# EAGLE board Panel2 (EAGLE 6.2)
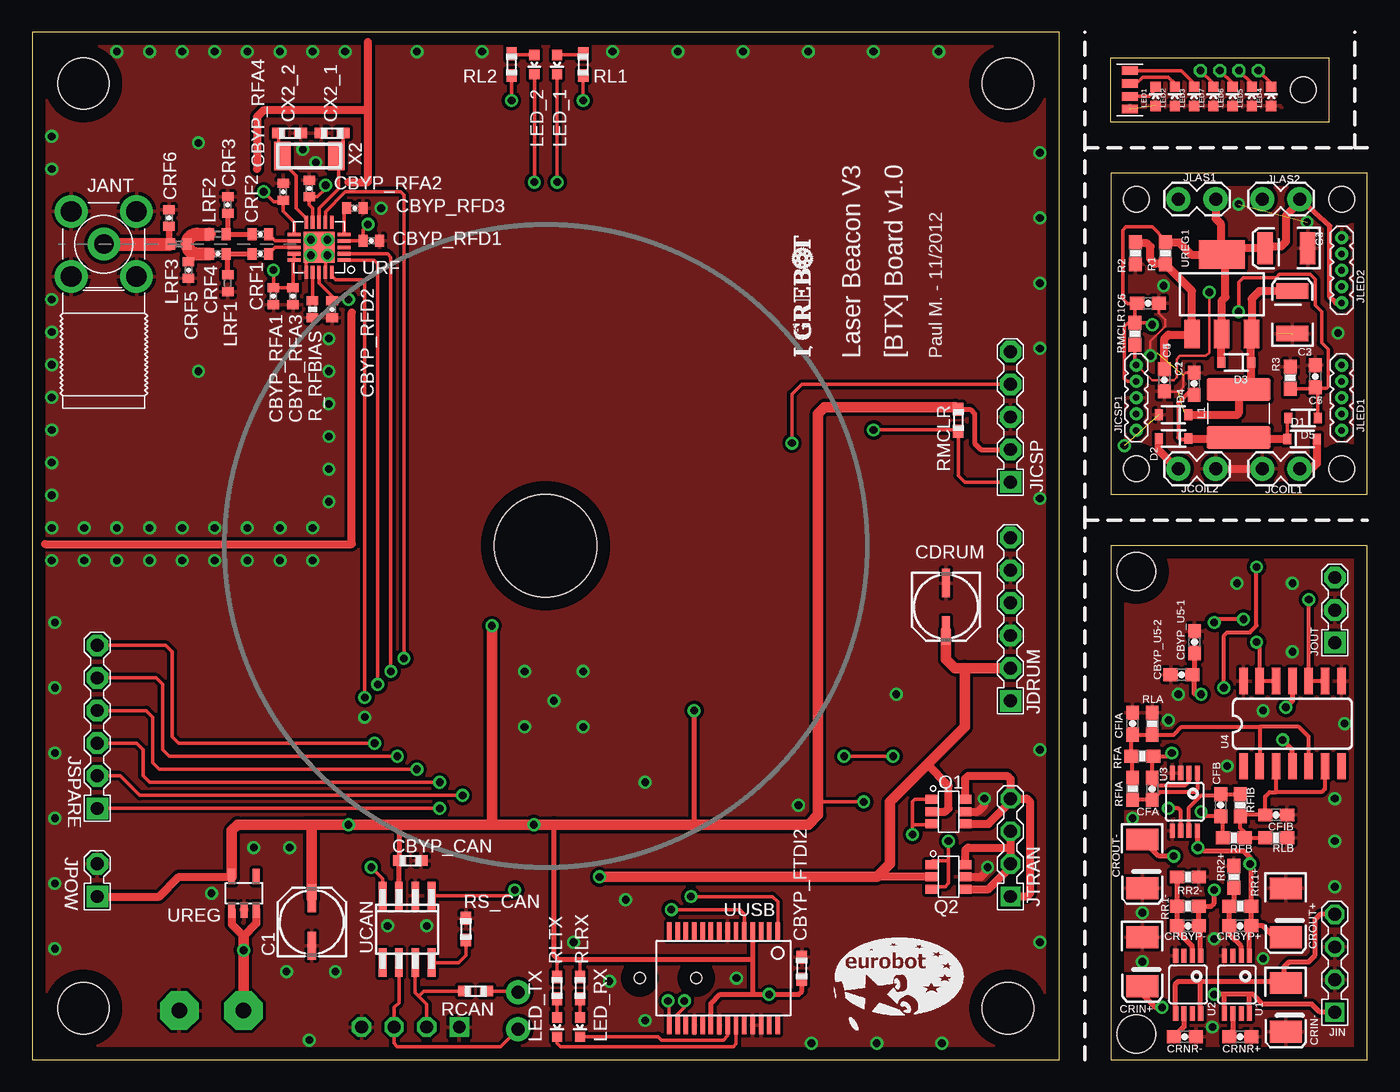
[diagram p0: board, top side]
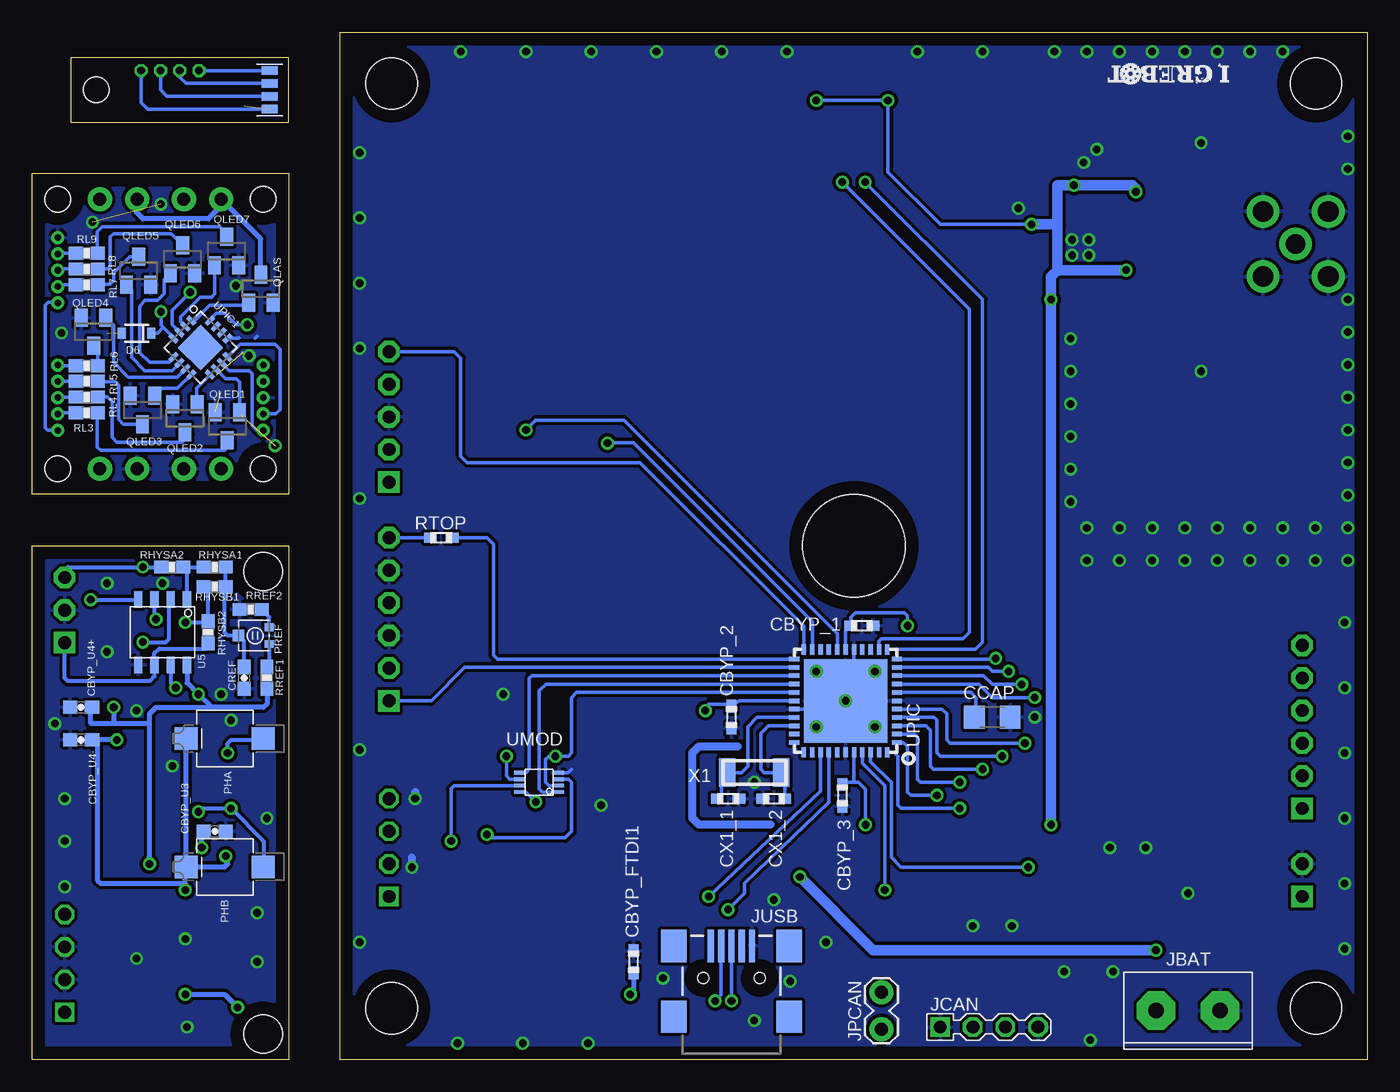
[diagram p1: board, bottom side, seen from below]

Size 104 x 80 mm. Coordinates in mm from the lower left corner, seen from the top.
Outline: 104,44 104,69 84,69 84,44 104,44
Outline: 101,73 84,73 84,78 101,78 101,73
Outline: 104,0 104,40 84,40 84,0 104,0
Outline: 0,0 80,0 80,80 0,80 0,0
Copper layers (1*16): Top 0.035mm / dielectric 1.5mm / Bottom 0.035mm
Design rules: minimum track width 10mil, minimum drill 24mil, track to track 8mil, track to pad 8mil, pad to pad 8mil, via to via 8mil, smd to smd 8mil, copper to edge 40mil, drill to drill 8mil, minimum pad ring 10mil, minimum via ring 8mil, stop-mask expansion 4mil, vias tented up to drill 0mil, thermal gap 10mil
Holes 2 mm at 86,46 102,46 86,67 102,67 99,75.5
Holes 3 mm at 86,38 86,2
Holes 4 mm at 4,4 4,76 76,76 76,4
Holes 8 mm at 40,40

## Footprints (pad centres in the part's own frame; a part is rotated, then mirrored left to right if it is on the bottom)
PANASONIC_C = smd 2.2 x 0.65: + 1.9,-0.2; - -1.8,-0.2
0603-CAP = smd 1.1 x 1: 1 -0.85,0; 2 0.85,0
EIA3528 = smd 1.2 x 2.5: A 1.65,0; C -1.65,0
R0603 = smd 1 x 0.8: 1 -0.85,0; 2 0.85,0
0402-CAP = smd 0.7 x 0.9: 1 -0.65,0; 2 0.65,0
1206 = smd 1.6 x 1.8: 1 -1.4,0; 2 1.4,0
EIA3528-KIT = smd 1.7 x 2.5: A 1.9,0; C -1.9,0
SOD-323 = smd 0.63 x 0.83: 1 -1.15,0; 2 1.15,0
SMA-PCB-ANGLE = drill 1.5 pad 2.54: A 0,0 | drill 1.6 pad 2.54: B1 -2.54,2.54; B2 2.54,2.54; B3 2.54,-2.54; B4 -2.54,-2.54
CON2-5.00 = drill 1.2 pad 3 octagon: 1 -2.5,0; 2 2.5,0
CON4-2.54 = drill 1 square: 1 -3.81,0 | drill 1 octagon: 2 -1.27,0; 3 1.27,0; 4 3.81,0
1X02_LOCK = drill 1.016 pad 1.88: 1 -0.178,0; 2 2.718,0
CON6-2.54 = drill 1 pad 1.676 square: 1 -6.35,0 | drill 1 pad 1.676 octagon: 2 -3.81,0; 3 -1.27,0; 4 1.27,0; 5 3.81,0; 6 6.35,0
CON5-2.54 = drill 1 pad 1.676 square: 1 -5.08,0 | drill 1 pad 1.676 octagon: 2 -2.54,0; 3 0,0; 4 2.54,0; 5 5.08,0
1X05-1.27MM = drill 0.508 pad 1: 1 0,0; 2 1.27,0; 3 2.54,0; 4 3.81,0; 5 5.08,0
CON8-SMD-1 = smd 0.66 x 1.27: 1 -1.5,0; 2 -0.5,0; 3 0.5,0; 4 1.5,0 | smd 0.66 x 1.27 bottom: 5 -1.5,0; 6 -0.5,0; 7 0.5,0; 8 1.5,0
CON3-2.54 = drill 1 pad 1.676 square: 1 -2.54,0 | drill 1 pad 1.676 octagon: 2 0,0; 3 2.54,0
CON2-2.54 = drill 1 pad 1.676 square: 1 -1.27,0 | drill 1 pad 1.676 octagon: 2 1.27,0
USB-MINIB = smd 2.5 x 0.5: D+ 2.5,0; D- 2.5,0.8; GND 2.5,-1.6; ID 2.5,-0.8; VBUS 2.5,1.6 | smd 2.5 x 2: MTN1 -3,4.5; MTN2 2.5,4.5; MTN3 -3,-4.5; MTN4 2.5,-4.5 | hole 0.9: 0,2.2; 0,-2.2
L-5X5 = smd 1.8 x 5: 1 -1.85,0; 2 1.85,0
LED-0603 = smd 0.8 x 0.8: A 0,-0.75; C 0,0.75
C0402 = smd 0.7 x 0.9: 1 -0.65,0; 2 0.65,0
VBPW34SR = smd 1.8 x 1.75: A -3,0; K 3,0
TRIM-PVZ2A = smd 0.6 x 0.7: 1 -0.65,-1.2; 3 0.65,-1.2 | smd 0.9 x 0.9: 2 0,1.2
SSOT6 = smd 0.7 x 1: 1 -0.95,-1.3; 2 0,-1.3; 3 0.95,-1.3; 4 0.95,1.3; 5 0,1.3; 6 -0.95,1.3
SOT23 = smd 1 x 1.4: 1 -0.95,-1.1; 2 0.95,-1.1; 3 0,1.1
0603-RES = smd 1.1 x 1: 1 -0.85,0; 2 0.85,0
0402-RES = smd 0.7 x 0.9: 1 -0.65,0; 2 0.65,0
MSOP8 = smd 0.4 x 1.1: 1 -0.975,-2.25; 2 -0.325,-2.25; 3 0.325,-2.25; 4 0.975,-2.25; 5 0.975,2.25; 6 0.325,2.25; 7 -0.325,2.25; 8 -0.975,2.25
SOIC14 = smd 0.66 x 2.032: 1 -3.81,-3.315; 2 -2.54,-3.315; 3 -1.27,-3.315; 4 0,-3.315; 5 1.27,-3.315; 6 2.54,-3.315; 7 3.81,-3.315; 8 3.81,3.315; 9 2.54,3.315; 10 1.27,3.315; 11 0,3.315; 12 -1.27,3.315; 13 -2.54,3.315; 14 -3.81,3.315
SOIC8 = smd 0.635 x 1.27: 1 -1.905,-2.54; 2 -0.635,-2.54; 3 0.635,-2.54; 4 1.905,-2.54; 5 1.905,2.54; 6 0.635,2.54; 7 -0.635,2.54; 8 -1.905,2.54
SO-08 = smd 0.6 x 2.2: 1 -1.905,-2.6; 2 -0.635,-2.6; 3 0.635,-2.6; 4 1.905,-2.6; 5 1.905,2.6; 6 0.635,2.6; 7 -0.635,2.6; 8 -1.905,2.6
DCU8 = smd 0.3 x 0.8: 1 -0.75,-1.55; 2 -0.25,-1.55; 3 0.25,-1.55; 4 0.75,-1.55; 5 0.75,1.55; 6 0.25,1.55; 7 -0.25,1.55; 8 -0.75,1.55
QFN44-8X8 = smd 0.8 x 0.35: P$1 -4,3.25; P$2 -4,2.6; P$3 -4,1.95; P$4 -4,1.3; P$5 -4,0.65; P$6 -4,0; P$7 -4,-0.65; P$8 -4,-1.3; P$9 -4,-1.95; P$10 -4,-2.6; P$11 -4,-3.25; P$23 4,-3.25; P$24 4,-2.6; P$25 4,-1.95; P$26 4,-1.3; P$27 4,-0.65; P$28 4,0; P$29 4,0.65; P$30 4,1.3; P$31 4,1.95; P$32 4,2.6; P$33 4,3.25 | smd 0.35 x 0.8: P$12 -3.25,-4; P$13 -2.6,-4; P$14 -1.95,-4; P$15 -1.3,-4; P$16 -0.65,-4; P$17 0,-4; P$18 0.65,-4; P$19 1.3,-4; P$20 1.95,-4; P$21 2.6,-4; P$22 3.25,-4; P$34 3.25,4; P$35 2.6,4; P$36 1.95,4; P$37 1.3,4; P$38 0.65,4; P$39 0,4; P$40 -0.65,4; P$41 -1.3,4; P$42 -1.95,4; P$43 -2.6,4; P$44 -3.25,4 | smd 6.5 x 6.5: PAD 0,0
QFN16-0.65 = smd 0.8 x 0.35: 1 -2,0.975; 2 -2,0.325; 3 -2,-0.325; 4 -2,-0.975; 9 2,-0.975; 10 2,-0.325; 11 2,0.325; 12 2,0.975 | smd 0.35 x 0.8: 5 -0.975,-2; 6 -0.325,-2; 7 0.325,-2; 8 0.975,-2; 13 0.975,2; 14 0.325,2; 15 -0.325,2; 16 -0.975,2 | smd 2.5 x 2.5: PAD 0,0
SOT23-5L = smd 0.55 x 1.2: 1 -0.95,-1.3; 2 0,-1.3; 3 0.95,-1.3; 4 0.95,1.3; 5 -0.95,1.3
SOT223 = smd 1.219 x 2.235: 1 -2.311,-3.099; 2 0,-3.099; 3 2.311,-3.099 | smd 3.6 x 2.2: 4 0,3.099
QFN20-0.5 = smd 0.28 x 1: 1 -1,-1.95; 2 -0.5,-1.95; 3 0,-1.95; 4 0.5,-1.95; 5 1,-1.95; 11 1,1.95; 12 0.5,1.95; 13 0,1.95; 14 -0.5,1.95; 15 -1,1.95 | smd 1 x 0.28: 6 1.95,-1; 7 1.95,-0.5; 8 1.95,0; 9 1.95,0.5; 10 1.95,1; 16 -1.95,1; 17 -1.95,0.5; 18 -1.95,0; 19 -1.95,-0.5; 20 -1.95,-1 | smd 2.4 x 2.4: PAD 0,0
SSOP28DB = smd 0.348 x 1.397: 1 -4.225,-3.656; 2 -3.575,-3.656; 3 -2.925,-3.656; 4 -2.275,-3.656; 5 -1.625,-3.656; 6 -0.975,-3.656; 7 -0.325,-3.656; 8 0.325,-3.656; 9 0.975,-3.656; 10 1.625,-3.656; 11 2.275,-3.656; 12 2.925,-3.656; 13 3.575,-3.656; 14 4.225,-3.656; 15 4.225,3.656; 16 3.575,3.656; 17 2.925,3.656; 18 2.275,3.656; 19 1.625,3.656; 20 0.975,3.656; 21 0.325,3.656; 22 -0.325,3.656; 23 -0.975,3.656; 24 -1.625,3.656; 25 -2.275,3.656; 26 -2.925,3.656; 27 -3.575,3.656; 28 -4.225,3.656
XTAL_4.9-1.8 = smd 1.3 x 2.2: P$1 -2.1,0; P$2 2.1,0

## Placement (x,y rotation side)
C1  10uF  [PANASONIC_C]  21.59,10.67 90 top
C2  100nF  [0603-CAP]  90.51,52.62 90 top
C3  10uF  [EIA3528]  98.14,58.18 90 top
C4  10uF  [EIA3528]  97.69,63.17 180 top
C5  100nF  [0603-CAP]  88.19,52.9 270 top
C6  100nF  [0603-CAP]  86.91,58.89 0 top
C7  1nF  [0603-CAP]  99.93,53.2 90 top
CBYP_1  100nF_6.3V  [R0603]  39.37,33.78 0 bottom
CBYP_2  100nF_6.3V  [R0603]  49.53,26.67 270 bottom
CBYP_3  100nF_6.3V  [R0603]  40.89,20.57 270 bottom
CBYP_CAN  100nF_6.3V  [R0603]  29.46,15.49 0 top
CBYP_FTDI1  100nF_6.3V  [R0603]  57.15,7.62 90 bottom
CBYP_FTDI2  100nF_6.3V  [R0603]  59.94,7.11 90 top
CBYP_RFA1  100nF_X5R  [0402-CAP]  18.8,59.44 90 top
CBYP_RFA2  100nF_X5R  [0402-CAP]  21.59,67.82 270 top
CBYP_RFA3  220pF_X7R  [0402-CAP]  20.32,59.44 90 top
CBYP_RFA4  220pF_X7R  [0402-CAP]  19.56,67.56 270 top
CBYP_RFD1  100nF_X5R  [0402-CAP]  26.42,63.75 180 top
CBYP_RFD2  220pF_X7R  [0402-CAP]  23.37,58.42 90 top
CBYP_RFD3  100nF_X5R  [0402-CAP]  25.15,66.29 180 top
CBYP_U3  1uF  [0603-CAP]  89.78,17.78 0 bottom
CBYP_U4+  1uF  [0603-CAP]  100.19,27.43 180 bottom
CBYP_U4-  1uF  [0603-CAP]  100.19,24.89 0 bottom
CBYP_U5-1  1uF  [0603-CAP]  90.54,32.51 90 top
CBYP_U5-2  100nF  [0603-CAP]  89.52,29.97 180 top
CCAP  10uF_6.3V  [1206]  29.21,26.67 0 bottom
CDRUM  10uF  [PANASONIC_C]  71.37,35.31 270 top
CFA  33pF  [0603-CAP]  87.24,21.08 270 top
CFB  33pF  [0603-CAP]  92.57,19.81 90 top
CFIA  100nF  [0603-CAP]  85.71,26.16 90 top
CFIB  100nF  [0603-CAP]  96.89,19.05 0 top
CRBYP+  10nF  [0603-CAP]  94.09,10.41 180 top
CRBYP-  10nF  [0603-CAP]  90.03,10.41 180 top
CREF  470nF  [0603-CAP]  87.49,29.72 270 bottom
CRF1  100pF_NP0  [0402-CAP]  17.78,62.74 180 top
CRF2  100pF_NP0  [0402-CAP]  17.78,64.26 180 top
CRF3  1.0pF_NP0  [0402-CAP]  15.24,66.55 270 top
CRF4  1.0pF_NP0  [0402-CAP]  14.48,62.74 0 top
CRF5  1.8pF_NP0  [0402-CAP]  12.19,61.47 90 top
CRF6  1.5pF_NP0  [0402-CAP]  10.67,65.53 270 top
CRIN+  10uF  [EIA3528-KIT]  86.47,7.62 270 top
CRIN-  10uF  [EIA3528-KIT]  97.65,4.06 270 top
CRNR+  10nF  [0603-CAP]  94.09,1.78 0 top
CRNR-  10nF  [0603-CAP]  89.78,1.78 0 top
CROUT+  10uF  [EIA3528-KIT]  97.65,11.43 270 top
CROUT-  10uF  [EIA3528-KIT]  86.47,15.24 270 top
CX1_1  22pF_6.3V  [R0603]  49.78,20.32 0 bottom
CX1_2  22pF_6.3V  [R0603]  46.23,20.32 180 bottom
CX2_1  22pF_6.3V  [R0603]  23.37,72.14 180 top
CX2_2  22pF_6.3V  [R0603]  20.07,72.14 0 top
D1  PMEG4005AEA  [SOD-323]  98.92,48.32 0 top
D2  PMEG4005AEA  [SOD-323]  88.9,48.35 180 top
D3  1N4002  [SOD-323]  93.79,54.27 180 top
D4  PDZ15B-115  [SOD-323]  88.9,50.21 180 top
D5  PDZ15B-115  [SOD-323]  98.99,49.95 180 top
D6  [SOD-323]  95.86,56.56 180 bottom
JANT  ENG_CD_1814400_C1  [SMA-PCB-ANGLE]  5.59,63.5 270 top
JBAT  MULTICOMP_PA001-2  [CON2-5.00]  13.97,3.81 0 bottom
JCAN  SIL4  [CON4-2.54]  29.46,2.54 0 bottom
JCOIL1  [1X02_LOCK]  98.54,46 180 top
JCOIL2  [1X02_LOCK]  89.46,46 0 top
JDRUM  SIL6  [CON6-2.54]  76.2,34.29 90 top
JICSP  SIL5  [CON5-2.54]  76.2,50.04 90 top
JICSP1  [1X05-1.27MM]  86,54.08 270 top
JIN  SIL4  [CON4-2.54]  101.46,7.5 90 top
JLAS1  [1X02_LOCK]  92,67 180 top
JLAS2  [1X02_LOCK]  98.54,67 180 top
JLED  CON8_SMD-1  [CON8-SMD-1]  85.5,75.5 90 top
JLED1  [1X05-1.27MM]  102,49 90 top
JLED2  [1X05-1.27MM]  102,58.92 90 top
JOUT  SIL3  [CON3-2.54]  101.46,35 90 top
JPCAN  [1X02_LOCK]  37.85,5.08 270 bottom
JPOW  SIL2  [CON2-2.54]  5.08,13.97 90 top
JSPARE  SIL6  [CON6-2.54]  5.08,25.91 90 top
JTRAN  SIL4  [CON4-2.54]  76.2,16.51 90 top
JUSB  USBSMD  [USB-MINIB]  49.53,6.35 90 bottom
L1  220uF  [L-5X5]  93.97,50.31 90 top
LED1  [LED-0603]  87.5,75 0 top
LED2  [LED-0603]  89,75 0 top
LED3  [LED-0603]  90.5,75 0 top
LED4  [LED-0603]  96.5,75 0 top
LED5  [LED-0603]  95,75 0 top
LED6  [LED-0603]  93.5,75 0 top
LED7  [LED-0603]  92,75 0 top
LED_1  [LED-0603]  40.89,77.47 180 top
LED_2  [LED-0603]  39.12,77.47 180 top
LED_RX  [LED-0603]  42.67,2.54 180 top
LED_TX  [LED-0603]  40.89,2.54 180 top
LRF1  1.2nH  [C0402]  15.24,60.45 90 top
LRF2  1.2nH  [C0402]  14.48,64.26 180 top
LRF3  1.2nH  [C0402]  11.43,63.5 180 top
PHA  VBPW34SR  [VBPW34SR]  89,25 0 bottom
PHB  VBPW34SR  [VBPW34SR]  89,15 0 bottom
PREF  100k  [TRIM-PVZ2A]  86.73,33.02 90 bottom
Q1  FDC6333C  [SSOT6]  71.37,19.3 270 top
Q2  FDC6333C  [SSOT6]  71.37,14.22 270 top
QLAS  BSS138  [SOT23]  86.18,60.02 0 bottom
QLED1  BSS138  [SOT23]  88.8,49.31 180 bottom
QLED2  BSS138  [SOT23]  92.1,49.95 180 bottom
QLED3  BSS138  [SOT23]  95.4,50.58 180 bottom
QLED4  BSS138  [SOT23]  99.21,56.67 180 bottom
QLED5  BSS138  [SOT23]  95.71,61.43 0 bottom
QLED6  BSS138  [SOT23]  92.28,62.32 0 bottom
QLED7  BSS138  [SOT23]  88.85,62.95 0 bottom
R1  10k  [0603-RES]  88.27,62.79 90 top
R2  14k  [0603-RES]  85.93,62.79 90 top
R3  10k  [0603-RES]  97.98,53.09 270 top
R_RFBIAS  56k  [0402-RES]  21.84,58.42 270 top
RCAN  100  [R0603]  34.54,5.33 0 top
RFA  20k  [0603-RES]  86.47,23.62 180 top
RFB  20k  [0603-RES]  93.59,17.27 0 top
RFIA  100  [0603-RES]  85.71,21.08 90 top
RFIB  100  [0603-RES]  94.09,19.81 270 top
RHYSA1  100  [0603-RES]  89.78,38.35 180 bottom
RHYSA2  10k  [0603-RES]  93.08,38.35 180 bottom
RHYSB1  100  [0603-RES]  89.78,36.83 180 bottom
RHYSB2  10k  [0603-RES]  90.28,33.27 270 bottom
RL1  270  [R0603]  42.93,77.47 90 top
RL2  270  [R0603]  37.34,77.47 90 top
RL3  270  [0603-RES]  99.74,50.37 180 bottom
RL4  270  [0603-RES]  99.74,51.59 180 bottom
RL5  270  [0603-RES]  99.74,52.81 180 bottom
RL6  270  [0603-RES]  99.74,54.03 180 bottom
RL7  270  [0603-RES]  99.74,60.34 180 bottom
RL8  270  [0603-RES]  99.74,61.56 180 bottom
RL9  270  [0603-RES]  99.74,62.78 180 bottom
RLA  100k  [0603-RES]  87.24,26.16 270 top
RLB  100k  [0603-RES]  96.89,17.27 180 top
RLRX  270  [R0603]  42.67,5.59 270 top
RLTX  270  [R0603]  40.89,5.59 270 top
RMCLR  4.7k  [R0603]  72.14,49.78 270 top
RMCLR1  4.7k  [0603-RES]  85.89,56.52 90 top
RR1+  31.6k  [0603-RES]  94.09,11.94 0 top
RR1-  31.6k  [0603-RES]  90.03,11.94 0 top
RR2+  10k  [0603-RES]  93.59,14.22 270 top
RR2-  10k  [0603-RES]  90.03,14.22 180 top
RREF1  100  [0603-RES]  85.71,29.72 90 bottom
RREF2  100  [0603-RES]  86.98,35.05 0 bottom
RS_CAN  10k  [R0603]  33.78,10.16 270 top
RTOP  100  [R0603]  72.14,40.64 180 bottom
U1  TPS7A4901NO_PAD  [MSOP8]  93.84,5.84 180 top
U2  TPS7A3001NO_PAD  [MSOP8]  90.03,5.84 180 top
U3  OPA2380  [MSOP8]  89.78,20.07 180 top
U4  INA2143  [SOIC14]  98.16,26.16 0 top
U5  TLV3502  [SOIC8]  93.84,33.27 180 bottom
U$3  LOGOEUROBOT  [LOGO_EUROBOT_1]  61.98,1.78 0 top
U$5  LOGOIGREBOT  [LOGO_IGREBOT]  60.96,54.61 90 top
U$9  LOGOIGREBOT  [LOGO_IGREBOT]  10.67,77.72 180 bottom
UCAN  MCP2551  [SO-08]  29.21,10.16 180 top
UMOD  SN74LVC2G08DCU  [DCU8]  64.52,21.59 90 bottom
UPIC  DSPIC33FJ128MC804_QFN  [QFN44-8X8]  40.64,27.94 180 bottom
UPIC1  PIC16F1825  [QFN16-0.65]  90.88,55.43 315 bottom
UREG  MCP1801  [SOT23-5L]  16.51,12.95 0 top
UREG1  TLV1117  [SOT223]  92.65,59.59 0 top
URF  CC2500  [QFN20-0.5]  22.35,63.25 90 top
UUSB  FT232RL-BASICSSOP  [SSOP28DB]  53.85,6.35 180 top
X1  8MHz  [XTAL_4.9-1.8]  47.75,22.35 0 bottom
X2  26MHz  [XTAL_4.9-1.8]  21.59,70.36 180 top

## Library data of the parts
C1-C7 CBYP_RFA1-CBYP_RFA4 CBYP_RFD1-CBYP_RFD3 CBYP_U3 CBYP_U4+ CBYP_U4- CBYP_U5-1 CBYP_U5-2 CDRUM CFA CFB CFIA CFIB CRBYP+ CRBYP- CREF CRF1-CRF6 CRIN+ CRIN- CRNR+ CRNR- CROUT+ CROUT- JPCAN LRF1-LRF3 R1-R3 R_RFBIAS RFA RFB RFIA RFIB RHYSA1 RHYSA2 RHYSB1 RHYSB2 RL3-RL9 RLA RLB RMCLR1 RR1+ RR1- RR2+ RR2- RREF1 RREF2 = SparkFun-Passives
CBYP_1-CBYP_3 CBYP_CAN CBYP_FTDI1 CBYP_FTDI2 CX1_1 CX1_2 CX2_1 CX2_2 RCAN RL1 RL2 RLRX RLTX RMCLR RS_CAN RTOP U$3 U$5 U$9 UCAN UPIC UREG X1 X2 = 0SBLib
CCAP JUSB LED_1 LED_2 LED_RX LED_TX UUSB = SparkFun
D1-D6 = SparkFun-DiscreteSemi
JANT JBAT JCAN JDRUM JICSP JIN JLED JOUT JPOW JSPARE JTRAN L1 PHA PHB PREF Q1 Q2 U1-U5 UMOD UPIC1 URF = lib_paul_v6
JCOIL1 JCOIL2 JICSP1 JLAS1 JLAS2 JLED1 JLED2 = SparkFun-Connectors
LED1-LED7 = SparkFun-LED
QLAS QLED1-QLED7 = transistor-small-signal
UREG1 = SparkFun-PowerIC

## Nets
3.3V: C1.+ CBYP_1.1 CBYP_2.1 CBYP_3.1 CBYP_CAN.1 CBYP_FTDI1.1 CBYP_FTDI2.1 CBYP_RFA1.2 CBYP_RFA2.2 CBYP_RFA3.2 CBYP_RFA4.2 CBYP_RFD1.2 CBYP_RFD2.2 JICSP.2 JPOW.1 RL1.1 RL2.1 RLRX.1 RLTX.1 RMCLR.1 UCAN.3 UMOD.8 UPIC.P$17 UPIC.P$28 UPIC.P$40 UREG.5 URF.4 URF.9 URF.11 URF.14 URF.15 URF.18 UUSB.4 UUSB.20
!CMP_A-B!: JOUT.1 RHYSB2.2 U5.6
!CMP_B-A!: JOUT.3 RHYSA2.2 U5.7
!MCLR!: JICSP.1 RMCLR.2 UPIC.P$18
!MCLR!1: JICSP1.1 RMCLR1.1 UPIC1.3
+3V3: C4.A C6.1 D3.2 JICSP1.2 JLAS1.1 JLAS2.1 JLED1.1 JLED2.1 R1.2 RMCLR1.2 UPIC1.16 UREG1.2 UREG1.4
+5V: CBYP_U3.1 CBYP_U4+.1 CBYP_U5-1.1 CBYP_U5-2.1 CRBYP+.1 CROUT+.A RR1+.2 RREF1.1 U1.1 U3.8 U4.11 U5.8
+12V: CDRUM.+ JBAT.1 JDRUM.2 Q1.2 Q2.2 UREG.1 UREG.3
-5V: CBYP_U4-.2 CRBYP-.1 CROUT-.C PHA.A PHB.A RR1-.2 U2.1 U4.4
AGND: CBYP_U3.2 CBYP_U4+.2 CBYP_U4-.1 CBYP_U5-1.2 CBYP_U5-2.2 CFIA.2 CFIB.2 CREF.2 CRIN+.C CRIN-.A CRNR+.2 CRNR-.2 CROUT+.C CROUT-.A JIN.2 JIN.3 JOUT.2 RLA.1 RLB.1 RR2+.1 RR2-.1 RREF2.1 U1.4 U2.4 U3.3 U3.4 U3.5 U4.8 U4.14 U5.5
CAN_RX: UCAN.4 UPIC.P$42
CAN_TX: UCAN.1 UPIC.P$41
CANH: JCAN.2 RCAN.1 UCAN.7
CANL: JCAN.3 JPCAN.2 UCAN.6
DRUM_PWM: JDRUM.1 UPIC.P$24
DRUM_TOP: RTOP.1 UPIC.P$23
GND: C1.- CBYP_1.2 CBYP_2.2 CBYP_3.2 CBYP_CAN.2 CBYP_FTDI1.2 CBYP_FTDI2.2 CBYP_RFA1.1 CBYP_RFA2.1 CBYP_RFA3.1 CBYP_RFA4.1 CBYP_RFD1.1 CBYP_RFD2.1 CBYP_RFD3.1 CCAP.2 CDRUM.- CRF3.1 CRF5.1 CRF6.1 CX1_1.2 CX1_2.2 CX2_1.2 CX2_2.2 JANT.B1 JANT.B2 JANT.B3 JANT.B4 JBAT.2 JCAN.1 JCAN.4 JDRUM.3 JDRUM.5 JICSP.3 JPOW.2 JUSB.GND LRF1.1 Q1.5 Q2.5 R_RFBIAS.2 RS_CAN.1 UCAN.2 UMOD.4 UPIC.P$6 UPIC.P$16 UPIC.P$29 UPIC.P$39 UPIC.PAD UREG.2 URF.16 URF.19 URF.PAD UUSB.7 UUSB.18 UUSB.21 UUSB.25 UUSB.26
GND1: C2.2 C3.C C4.C C5.2 C6.2 C7.2 D4.2 D6.2 JCOIL1.2 JCOIL2.2 JICSP1.3 JLED2.5 QLAS.2 QLED1.2 QLED2.2 QLED3.2 QLED4.2 QLED5.2 QLED6.2 QLED7.2 R2.1 R3.1 UPIC1.13
LAS_ON: QLAS.1 UPIC1.1
LAS_POW: JLAS1.2 JLAS2.2 QLAS.3
LED_1: LED_1.C UPIC.P$13
LED_2: LED_2.C UPIC.P$12
LED_ON1: QLED1.1 UPIC1.10
LED_ON2: QLED2.1 UPIC1.9
LED_ON3: QLED3.1 UPIC1.8
LED_ON4: QLED4.1 UPIC1.7
LED_ON5: QLED5.1 UPIC1.6
LED_ON6: QLED6.1 UPIC1.5
LED_ON7: QLED7.1 UPIC1.2
LED_POW1: JLED1.2 RL3.2
LED_POW2: JLED1.3 RL4.2
LED_POW3: JLED1.4 RL5.2
LED_POW4: JLED1.5 RL6.2
LED_POW5: JLED2.2 RL7.2
LED_POW6: JLED2.3 RL8.2
LED_POW7: JLED2.4 RL9.2
LED_RX: LED_RX.C UUSB.22
LED_TX: LED_TX.C UUSB.23
MOD_N: Q1.1 Q1.3 UMOD.3
MOD_P: Q2.1 Q2.3 UMOD.7
MOD_PWM_N: UMOD.5 UPIC.P$25
MOD_PWM_P: UMOD.1 UPIC.P$26
MOD_TX: UMOD.2 UMOD.6 UPIC.P$27
N$1: CRF1.2 CRF4.2 LRF1.2
N$2: LED_TX.A RLTX.2
N$3: CRF2.2 CRF3.2 LRF2.1
N$4: CRF4.1 CRF5.2 LRF2.2 LRF3.1
N$5: RS_CAN.2 UCAN.8
N$6: JPCAN.1 RCAN.2
N$7: CRF6.2 JANT.A LRF3.2
N$8: LED_RX.A RLRX.2
N$9: LED_1.A RL1.2
N$10: LED_2.A RL2.2
N$11: D1.2 JCOIL1.1
N$12: D2.2 JCOIL2.1
N$13: C5.1 R1.1 R2.2 UREG1.1
N$15: QLED1.3 RL3.1
N$16: QLED2.3 RL4.1
N$17: QLED3.3 RL5.1
N$18: QLED4.3 RL6.1
N$19: QLED5.3 RL7.1
N$20: QLED6.3 RL8.1
N$21: QLED7.3 RL9.1
N$22: JLED.2 LED1.C
N$23: JLED.3 LED2.C
N$24: JLED.4 LED3.C
N$25: JLED.5 LED4.C
N$26: JLED.6 LED5.C
N$27: JLED.7 LED6.C
N$28: JLED.8 LED7.C
N$29: JLED.1 LED1.A LED2.A LED3.A LED4.A LED5.A LED6.A LED7.A
N$30: CRNR+.1 U1.6
N$31: CRNR-.1 U2.6
N$32: CRBYP+.2 RR1+.1 RR2+.2 U1.2
N$33: CRBYP-.2 RR1-.1 RR2-.2 U2.2
N$34: CFA.2 RFIA.1 U3.1
N$35: CFA.1 PHA.K RFA.1 U3.2
N$36: CFB.2 RFIB.1 U3.7
N$37: CFB.1 PHB.K RFB.1 U3.6
N$38: RHYSA1.2 RHYSA2.1 U5.1
N$39: RHYSB1.2 RHYSB2.1 U5.3
N$40: PREF.1 RREF1.2
N$41: PREF.3 RREF2.2
PGC: JICSP.5 UPIC.P$22
PGC1: JICSP1.5 UPIC1.11
PGD: JICSP.4 UPIC.P$21
PGD1: JICSP1.4 UPIC1.12
R_RFBIAS: R_RFBIAS.1 URF.17
RF_!CSN!: UPIC.P$11 URF.7
RF_MISO: UPIC.P$10 URF.2
RF_MOSI: UPIC.P$8 URF.20
RF_N: CRF1.1 URF.13
RF_P: CRF2.1 URF.12
RF_SCLK: UPIC.P$9 URF.1
RTOP: JDRUM.6 RTOP.2
SPARE1: JSPARE.1 UPIC.P$44
SPARE2: JSPARE.2 UPIC.P$1
SPARE3: JSPARE.3 UPIC.P$2
SPARE4: JSPARE.4 UPIC.P$3
SPARE5: JSPARE.5 UPIC.P$4
SPARE6: JSPARE.6 UPIC.P$5
SUB_A-B: U4.9 U4.10 U5.4
SUB_B-A: U4.12 U4.13 U5.2
TI_A: CFIA.1 RFA.2 RFIA.2 RLA.2 U4.2 U4.5
TI_B: CFIB.1 RFB.2 RFIB.2 RLB.2 U4.3 U4.6
TRANSF_N: JTRAN.2 JTRAN.3 Q2.4 Q2.6
TRANSF_P: JTRAN.1 JTRAN.4 Q1.4 Q1.6
UART_RX: C7.1 D5.1 D6.1 R3.2 UPIC1.4
USB_RX: UPIC.P$37 UUSB.5
USB_TX: UPIC.P$36 UUSB.1
USBDM: JUSB.D- UUSB.16
USBDP: JUSB.D+ UUSB.15
VCAP: CCAP.1 UPIC.P$7
VDC: C2.1 D1.1 D2.1 D5.2 L1.1
VDCOUPL: CBYP_RFD3.2 URF.5
VIN: C3.A D3.1 D4.1 L1.2 UREG1.3
VIN+: CRIN+.A JIN.1 U1.5 U1.8
VIN-: CRIN-.C JIN.4 U2.5 U2.8
VREF: CREF.1 PREF.2 RHYSA1.1 RHYSB1.1
X1_OSC1: CX1_1.1 UPIC.P$30 X1.P$1
X1_OSC2: CX1_2.1 UPIC.P$31 X1.P$2
X2_OSC1: CX2_1.1 URF.8 X2.P$1
X2_OSC2: CX2_2.1 URF.10 X2.P$2

## Tracks (layer width: path | path; a pad name or v marks a point on that pad's centre or on a via)
3.3V  (via drill 0.6)
  Top 0.254: URF.9 21.85,66.29 21.59,66.55 CBYP_RFA2.2 22.21,67.17 22.86,67.82 v22.86,68.07 | URF.18 22.35,60.45 23.37,59.44 23.37,59.18 | 23.37,59.18 CBYP_RFD2.2 | URF.14 URF.15 20.32,62.16 CBYP_RFA3.2 CBYP_RFA1.2 v18.8,61.47 | v18.03,67.56 18.8,66.8 19.7,66.8 CBYP_RFA4.2 19.56,66.04 20.4,65.2 URF.11 | 23.37,59.18 v24.64,59.18 | RL1.1 v42.93,74.68 | RL2.1 v37.34,74.68 | RLTX.1 40.89,7.52 41.15,7.77 | RLRX.1 42.67,7.77 | 61.21,20.07 v64.77,20.07 | 51.54,27.15 v51.56,27.18 | URF.4 25.76,63.75 CBYP_RFD1.2 25.77,64.63 v26.16,65.02
  Top 0.406: UCAN.3 28.57,15.46 CBYP_CAN.1 28.61,18.12 28.45,18.29 | UUSB.20 52.87,4.36 53.59,5.08 56.13,5.08 | UUSB.4 56.12,7.77 | 56.12,7.77 56.12,5.09 56.13,5.08 | 56.13,5.08 v57.4,5.08 59.69,5.08 59.94,5.33 CBYP_FTDI2.1 | 56.12,7.77 42.67,7.77 41.15,7.77 41,7.77 40.64,8.13 40.64,18.29 | 51.54,27.15 51.54,18.32 51.56,18.29 | v35.81,33.78 | RMCLR.1 73.06,50.63 73.41,50.29 73.41,48.01 73.91,47.5 JICSP.2
  Top 0.61: JPOW.1 9.91,12.7 11.43,14.22 15.53,14.22 UREG.5
  Top 0.813: 35.81,18.29 28.45,18.29 v24.64,18.29 21.59,18.29 | 35.81,18.29 v39.08,18.29 40.64,18.29 51.56,18.29 60.45,18.29 61.21,19.05 61.21,20.07 61.21,50.29 61.72,50.8 71.88,50.8 72.05,50.71 RMCLR.1 | 35.81,18.29 v35.81,33.78 | UREG.5 15.56,17.85 16,18.29 21.34,18.29 | 21.34,18.29 21.59,18.29 | C1.+ 21.79,18.09 21.59,18.29 | 21.34,18.29
  Bottom 0.254: UPIC.P$28 48.93,27.94 CBYP_2.1 49.7,27.69 51.31,27.69 51.56,27.43 v51.56,27.18 | v42.93,74.68 v37.34,74.68 37.34,69.09 33.27,65.02 v26.16,65.02 | v64.77,20.07 65.53,20.83 66.05,20.83 UMOD.8 | v39.08,18.29 39.08,21.05 39.62,21.59 39.88,21.59 | 39.88,21.59 40.73,21.59 CBYP_3.1 | UPIC.P$40 39.99,21.7 39.88,21.59 | UPIC.P$17 40.64,33.36 CBYP_1.1 40.22,34.46 39.88,34.8 36.07,34.8 35.81,34.54 v35.81,33.78
  Bottom 0.406: 23.88,61.47 24,61.59 24.13,61.72 | CBYP_FTDI1.1 57.15,5.33 v57.4,5.08
  Bottom 0.813: v18.03,67.56 18.03,67.82 18.29,68.07 v22.86,68.07 24.13,68.07 24.13,65.02 | v18.8,61.47 23.88,61.47 | 24.13,61.72 24.13,65.02 | v24.64,59.18 24.64,60.96 24,61.59 | v26.16,65.02 24.13,65.02 | v24.64,59.18 | v24.64,59.18 v24.64,18.29
!CMP_A-B!
  Bottom 0.305: RHYSB2.2 90.45,32 94.09,32 94.47,31.62 U5.6 94.47,29.84 94.86,29.46 101.21,29.46 101.46,29.72 JOUT.1
!CMP_B-A!  (via drill 0.6)
  Top 0.305: v92.82,28.96 92.82,33.02 93.08,33.27 94.86,33.27 95.36,33.78 v95.36,38.35
  Bottom 0.305: U5.7 93.2,29.34 v92.82,28.96 | RHYSA2.2 v95.36,38.35 101.21,38.35 101.46,38.1 JOUT.3
!MCLR!  (via drill 0.6)
  Top 0.254: v65.53,49.02 72.05,49.02 RMCLR.2 72.14,45.47 72.64,44.96 JICSP.1
  Bottom 0.254: UPIC.P$18 41.29,33.16 57.91,49.78 64.77,49.78 v65.53,49.02
!MCLR!1  (via drill 0.6)
  Top 0.203: v91.68,59.75 91.68,55.05 91.43,54.8 89.39,54.8 89.14,54.54 89.14,53.12 88.94,52.89 87.24,52.89 JICSP1.1
  Top 0.254: RMCLR1.1 85.89,54.19 JICSP1.1
  Bottom 0.254: UPIC1.3 92.52,56.65 93.08,57.21 93.08,58.35 v91.68,59.75
+3V3  (via drill 0.6)
  Top 0.254: JICSP1.2 85.28,52.81 85.08,53.02 85.08,57.08 85.33,57.34 85.98,57.34 RMCLR1.2 | RMCLR1.2 87.08,57.37 v87.24,57.21 | 86.02,58.73 C6.1 | R1.2 88.27,63.8 87.24,64.83 85.2,64.83 84.95,64.57 84.95,59.24 85.33,58.86 86.03,58.86 C6.1 | RMCLR1.2 85.89,58.73 C6.1
  Top 0.406: JLED2.1 101.53,58.92 101.08,59.37 101.08,64.89 JLAS2.1
  Top 0.61: D3.2 92.64,56.47 UREG1.2 92.65,59.07 92.95,59.37 92.95,62.39 UREG1.4 | UREG1.4 93.27,63.17 C4.A 96.04,63.3 97.27,63.3 97.65,63.69 97.65,65.72 98.72,66.78 JLAS2.1 | R1.2 89.32,63.64 90.28,62.67 92.63,62.67 UREG1.4 | JLAS1.1 92.18,65.47 92.57,65.08 92.57,62.77 UREG1.4
  Bottom 0.254: UPIC1.16 90.15,57.59 89.65,58.1 89.01,58.1 88.12,57.21 v87.24,57.21 | JLED1.1 102.78,49 102.98,49.21 102.98,58.73 102.73,58.99 102.07,58.99 JLED2.1
+5V  (via drill 0.6)
  Top 0.406: U1.1 94.81,10.29 CRBYP+.1 | CRBYP+.1 RR1+.2 94.94,14.9 v94.86,15.24 94.86,15.75 94.35,16.26 91.3,16.26 v90.79,16.51 90.75,16.55 U3.8 | CROUT+.A 96.76,9.53 95.87,10.41 CRBYP+.1 | CBYP_U5-1.1 90.54,30.14 CBYP_U5-2.1 90.54,29.81 90.54,28.45 v91.05,28.45 | U4.11 98.16,27.94 v97.65,27.43
  Bottom 0.406: U5.8 91.94,29.34 v91.05,28.45 90.03,27.43 | RREF1.1 85.71,27.69 85.97,27.43 90.03,27.43 | v94.86,15.24 94.86,26.16 | 94.86,26.16 94.86,26.92 94.35,27.43 90.03,27.43 | 94.86,26.16 97.65,26.16 | 97.65,26.16 99.43,26.16 99.43,27.34 CBYP_U4+.1 | v97.65,27.43 97.65,26.16 | v90.79,16.51 90.79,17.61 CBYP_U3.1
+12V  (via drill 0.6)
  Top 0.508: 66.87,18.22 66.8,18.29
  Top 0.61: UREG.1 15.56,10.52 16.47,9.61 17.46,10.6 UREG.3 | Q1.2 71.12,19.3 71.37,19.56 71.37,21.34 69.72,22.99 | Q2.2 65.79,14.22
  Top 0.813: JBAT.1 v16.47,8.52 16.47,9.61 | v44.2,14.22 65.79,14.22 66.8,15.24 66.8,18.29 66.8,20.07 69.72,22.99 72.64,25.91 72.64,30.48 | 72.64,30.48 JDRUM.2 | CDRUM.+ 71.17,31.19 71.88,30.48 72.64,30.48
  Bottom 0.813: v16.47,8.52 38.49,8.52 v44.2,14.22
-5V  (via drill 0.6)
  Top 0.406: U2.1 91,10.29 CRBYP-.1 RR1-.2 91.81,11.94 92.06,12.19 v92.06,13.21 | 86.61,17.14 CROUT-.C 87.76,15.85 v88.92,15.85 | U4.4 98.16,24.13 v97.4,24.89
  Bottom 0.406: 91.4,24.4 PHA.A PHB.A | v97.4,24.89 98.92,24.89 | 98.92,24.89 CBYP_U4-.2 | 98.92,24.89 98.92,13.97 98.67,13.72 92.06,13.72 | PHB.A 92.06,14.94 92.06,13.72 | v92.06,13.21 92.06,13.72 | PHB.A 89,15 88.76,15.24 88.76,15.7 v88.92,15.85
AGND  (via drill 0.6)
  other vias: 101.46,13.46 101.46,17.02 101.46,20.32 98.16,31.75 102.22,26.16 95.87,27.18 98.16,37.08 93.84,37.08 86.47,7.62 86.47,11.43 95.87,7.87 92.06,9.4 89.27,28.45 93.08,22.86 88.51,26.42 91.94,2.54 85.71,18.8
  pour Top (isolate 0.254): 104,0 104,40.13 83.93,40.13 83.93,0
  pour Bottom (isolate 0.254): 104,0 104,40.13 83.93,40.13 83.93,0
CAN_RX  (via drill 0.6)
  Top 0.254: UCAN.4 27.3,14.1 v26.42,14.99
  Bottom 0.254: UPIC.P$42 38.69,23.2 37.08,21.59 37.08,15.75 36.32,14.99 v26.42,14.99
CAN_TX  (via drill 0.6)
  Top 0.254: UCAN.1 37.14,12.76 v37.59,13.21
  Bottom 0.254: UPIC.P$41 39.34,23.08 37.59,21.34 v37.59,13.21
CANH
  Top 0.254: UCAN.7 29.84,5.21 30.1,4.95 | 30.1,4.95 30.73,4.32 JCAN.2 | RCAN.1 30.48,5.33 30.1,4.95
CANL
  Top 0.254: UCAN.6 28.57,4.45 28.19,4.06 JCAN.3 28.19,1.27 28.45,1.02 36.5,1.02 JPCAN.2
DRUM_PWM
  Bottom 0.254: UPIC.P$24 70.3,30.54 72.9,27.94 JDRUM.1
DRUM_TOP
  Bottom 0.254: UPIC.P$23 67.77,31.19 68.07,31.5 68.07,40.13 68.58,40.64 RTOP.1
GND  (via drill 0.6)
  Top 0.254: URF.19 22.85,62.47 v23.01,62.63 | URF.16 21.35,62.27 v21.71,62.63
  Top 0.61: Q2.5 73.91,14.22 74.42,14.73 v74.42,14.99 | Q1.5 73.66,19.3 74.17,19.81 v74.17,20.32
  Bottom 0.254: UPIC.P$29 43.32,27.29 | 43.32,27.29 43.18,27.43 | UPIC.P$16 39.99,30.59 39.62,30.23 v38.35,30.23 | 43.32,27.29 43.32,27.07 42.93,26.67 v42.93,25.91 | UMOD.4 62.24,22.34 61.98,22.61
  Bottom 0.61: v74.42,14.99 74.42,15.75 | v74.17,20.32 74.17,20.83
  other vias: 21.71,63.83 23.01,63.83 27.18,66.29 21.08,70.87 22.1,69.85 1.52,41.4 4.06,41.4 6.6,41.4 9.14,41.4 11.68,41.4 14.22,41.4 16.76,41.4 19.3,41.4 21.84,41.4 1.52,38.86 4.06,38.86 6.6,38.86 9.14,38.86 11.68,38.86 14.22,38.86 16.76,38.86 19.3,38.86 21.84,38.86 1.52,43.94 1.52,46.48 1.52,49.02 1.52,51.56 1.52,54.1 1.52,56.64 1.52,59.18 1.52,69.34 1.52,71.88 6.6,78.49 9.14,78.49 11.68,78.49 14.22,78.49 16.76,78.49 19.3,78.49 21.84,78.49 24.38,78.49 23.11,43.43 23.11,45.97 23.11,48.51 23.11,51.05 23.11,53.59 23.11,56.13 12.95,53.59 12.95,71.37 42.93,30.23 38.35,25.91 40.64,27.94 47.75,21.59 60.71,1.27 65.79,1.27 70.87,1.27 78.49,9.14 78.49,24.13 67.31,28.45 78.49,43.69 78.49,55.37 78.49,60.45 78.49,65.53 78.49,70.61 70.61,78.49 21.59,1.52 1.78,8.64 1.78,13.72 1.78,18.8 1.78,23.88 1.78,28.96 1.78,34.04 65.53,78.49 60.45,78.49 55.37,78.49 50.29,78.49 45.21,78.49 35.05,78.49 29.97,78.49 25.91,26.67 54.86,6.35 47.75,3.05 44.96,6.1 42.16,9.14 46.23,12.45 27.69,10.41 30.73,10.41 13.97,12.95 17.27,16.51 20.07,16.51 19.81,6.86 23.62,6.86 59.69,19.81
  pour Bottom (isolate 0.254): 0,80.01 80.01,80.01 80.01,0 0,0
  pour Top (isolate 0.254, rank 4): 0,80.01 80.01,80.01 80.01,0 0,0
GND1  (via drill 0.6)  (5 unrouted)
  Top 0.203: C2.2 89.85,53.47 89.65,53.27 89.65,52.38 89.27,52 88.24,52 C5.2 | v87.11,54.8 87.11,55.94 88.25,57.08 88.25,57.59 87.74,58.1 87.74,58.88 C6.2
  Top 0.61: JCOIL2.2 JCOIL1.2
  Bottom 0.254: 88.72,56.16 UPIC1.13 87.91,56.16 87.87,56.19 | 87.62,55.05 87.24,55.05 | 86.64,56.16 86.47,56.32
  other vias: 101.71,56.57 85.08,47.81 93.97,66.61 88.12,60.26 99.3,65.21
  pour Top (isolate 0.254): 84.06,44 84.06,69.02 104,69.02 104,44
  pour Bottom (isolate 0.254): 83.93,44 104.13,44 104.13,69.02 83.93,69.02
LAS_ON
  Bottom 0.254: UPIC1.1 91.35,57.54 90.16,58.73 87.32,58.73 QLAS.1
LAS_POW
  Bottom 0.406: QLAS.3 86.18,63.9 JLAS1.2 89.28,66.47 90.28,65.46 95.36,65.46 95.87,65.97 95.87,66.95 JLAS2.2
LED_1  (via drill 0.6)
  Top 0.254: v40.89,68.33 LED_1.C
  Bottom 0.254: UPIC.P$13 38.04,32.57 37.85,32.77 31.5,32.77 30.99,33.27 30.99,58.42 v40.89,68.33
LED_2  (via drill 0.6)
  Top 0.254: v39.12,68.33 LED_2.C
  Bottom 0.254: UPIC.P$12 30.54,31.94 29.97,32.51 29.97,59.18 v39.12,68.33
LED_ON1
  Bottom 0.254: QLED1.1 87.85,52.74 88.12,53.02 88.92,53.02 UPIC1.10
LED_ON2
  Bottom 0.254: UPIC1.9 90.15,53.28 91.17,52.26 91.17,51.07 QLED2.1
LED_ON3
  Bottom 0.254: QLED3.1 93.88,52.26 92.7,52.26 91.62,53.33 UPIC1.8
LED_ON4
  Bottom 0.254: QLED4.1 97.65,57.16 97.65,54.29 96.51,53.14 92.7,53.14 UPIC1.7
LED_ON5
  Bottom 0.254: QLED5.1 96.25,59.92 96.25,54.67 95.24,53.65 93.08,53.65 92.52,54.21 UPIC1.6
LED_ON6
  Bottom 0.254: QLED6.1 93.71,60.73 93.71,59.62 94.22,59.11 95.24,59.11 95.62,58.6 95.62,55.05 94.86,54.29 93.33,54.29 92.98,54.64 UPIC1.5
LED_ON7
  Bottom 0.254: UPIC1.2 92.44,57.46 92.44,57.84 90.92,59.37 90.03,59.37 89.78,59.62 89.78,61.83 QLED7.1
LED_POW1
  Bottom 0.254: RL3.2 101.9,50.37 JLED1.2
LED_POW2
  Bottom 0.254: RL4.2 101.95,51.59 JLED1.3
LED_POW3
  Bottom 0.254: RL5.2 JLED1.4
LED_POW4
  Bottom 0.254: RL6.2 101.95,54.03 JLED1.5
LED_POW5
  Bottom 0.254: RL7.2 101.85,60.34 JLED2.2
LED_POW6
  Bottom 0.254: RL8.2 101.9,61.56 JLED2.3
LED_POW7
  Bottom 0.254: RL9.2 101.95,62.78 JLED2.4
LED_RX
  Top 0.254: LED_RX.C 48.76,1.79 49.02,1.52 53.85,1.52 54.17,1.85 UUSB.22
LED_TX
  Top 0.254: UUSB.23 54.82,1.23 54.61,1.02 41.15,1.02 40.89,1.27 LED_TX.C
MOD_N  (via drill 0.6)
  Top 0.254: 68.58,18.29 70.01,18.29 Q1.3 | Q1.1 68.77,20.25 68.58,20.07 68.58,18.29 | 68.58,18.29 v68.58,17.53
  Bottom 0.254: UMOD.3 62.23,21.84 61.98,21.59 61.98,17.78 62.48,17.27 68.33,17.27 v68.58,17.53
MOD_P  (via drill 0.6)
  Top 0.254: v71.37,17.02 71.37,15.49 | 71.37,15.49 71.37,13.72 71.12,13.46 70.14,13.46 Q2.3 | 71.37,15.49 70.14,15.49 | 70.1,15.49 70.14,15.49 | 70.14,15.49 Q2.1
  Bottom 0.254: UMOD.7 71.12,21.34 71.37,21.08 v71.37,17.02
MOD_PWM_N
  Bottom 0.254: UPIC.P$25 65.07,29.89 65.28,29.69 65.28,22.61 65.53,22.35 66.05,22.35 UMOD.5
MOD_PWM_P
  Bottom 0.254: UPIC.P$26 63.98,29.24 64.52,28.7 64.52,21.08 64.26,20.83 62.98,20.83 UMOD.1
MOD_TX  (via drill 0.6)
  Top 0.254: v67.06,23.62 v63.25,23.62
  Bottom 0.254: UPIC.P$27 61.58,28.59 61.98,28.19 61.98,23.88 62.23,23.62 v63.25,23.62 63.75,23.62 64.01,23.37 64.01,21.59 63.75,21.34 UMOD.2 | UMOD.6 66.8,21.84 67.06,22.1 v67.06,23.62
N$1
  Top 0.406: CRF1.2 CRF4.2 15.24,62.74 LRF1.2
N$2
  Top 0.254: LED_TX.A RLTX.2
N$3
  Top 0.406: CRF2.2 LRF2.1 15.24,64.26 CRF3.2
N$4
  Top 0.254: CRF5.2 arc-90 12.81,62.74 12.84,62.74
  Top 1.016: CRF4.1 12.84,62.74 arc-90 LRF3.1 arc-90 12.84,64.26 LRF2.2
N$5
  Top 0.254: UCAN.8 33.21,7.56 33.78,8.13 RS_CAN.2
N$6
  Top 0.254: RCAN.2 37.77,5.33 JPCAN.1
N$7
  Top 0.508: LRF3.2 arc-90 10.67,63.61 CRF6.2
  Top 1.016: JANT.A LRF3.2
N$8
  Top 0.254: LED_RX.A RLRX.2
N$9
  Top 0.254: LED_1.A 42.83,78.22 RL1.2
N$10
  Top 0.254: LED_2.A 37.44,78.22 RL2.2
N$11
  Top 0.61: D1.2 100.07,46.42 99.68,46.03 98.75,46.03 JCOIL1.1
N$12
  Top 0.61: JCOIL2.1 89.17,46 87.74,47.43 D2.2
N$13
  Top 0.61: C5.1 88.19,56.13 88.51,56.45 90.3,56.45 UREG1.1 90.34,59.86 R1.1 88.25,61.96 87.44,61.96 87.11,62.29 87.11,63.3 86.86,63.56 86.01,63.56 R2.2
N$14
  Bottom 0.61: 46.48,18.29 52.07,18.29 52.58,18.8 52.58,23.88 52.07,24.38 49.02,24.38
N$15
  Bottom 0.254: QLED1.3 88.42,48.03 89.01,47.43 98.67,47.43 98.92,47.68 98.92,50.33 RL3.1
N$16
  Bottom 0.254: QLED2.3 91.72,48.66 92.32,48.06 97.4,48.06 97.78,48.45 97.78,51.24 98.16,51.62 98.86,51.62 RL4.1
N$17
  Bottom 0.254: QLED3.3 96.91,49.48 97.27,49.84 97.27,52.51 97.52,52.76 98.84,52.76 RL5.1
N$18
  Bottom 0.254: RL6.1 98.89,55.25 QLED4.3
N$19
  Bottom 0.254: QLED5.3 96.4,62.53 97.65,61.27 97.65,60.64 97.9,60.38 98.84,60.38 RL7.1
N$20
  Bottom 0.254: RL8.1 98.13,61.56 97.9,61.78 97.9,64.07 97.65,64.32 93.18,64.32 QLED6.3
N$21
  Bottom 0.254: QLED7.3 88.85,64.28 89.39,64.83 98.54,64.83 98.92,64.45 98.92,62.81 RL9.1
N$22
  Top 0.254: LED1.C 87.5,75.5 87,75 JLED.2
N$23
  Top 0.254: LED2.C 89,76 88.5,76.5 86.5,76.5 86,76 JLED.3
N$24
  Top 0.254: JLED.4 89.5,77 90.5,76 LED3.C
N$25  (via drill 0.6)
  Top 0.254: LED4.C 96.5,76 v95.5,77
  Bottom 0.254: v95.5,77 95.5,74.5 95,74 JLED.5
N$26  (via drill 0.6)
  Top 0.254: LED5.C 95,76 v94,77
  Bottom 0.254: v94,77 94,75.5 93.5,75 JLED.6
N$27  (via drill 0.6)
  Top 0.254: LED6.C 93.5,76 v92.5,77
  Bottom 0.254: v92.5,77 92.5,76.5 92,76 JLED.7
N$28  (via drill 0.6)
  Top 0.254: LED7.C 92,76 v91,77
  Bottom 0.254: v91,77 JLED.8
N$29  (1 unrouted)
  pour Top: 84,73 84,78 101,78 101,73
N$30
  Top 0.406: U1.6 93.52,2.3 CRNR+.1
N$31
  Top 0.406: U2.6 89.7,2.56 CRNR-.1
N$32
  Top 0.406: U1.2 94.17,8.82 93.33,9.65 93.33,10.33 CRBYP+.2 RR1+.1 93.59,12.28 RR2+.2
N$33
  Top 0.406: U2.2 90.36,8.82 89.18,9.99 CRBYP-.2 RR1-.1 RR2-.2
N$34
  Top 0.305: U3.1 90.75,21.04 90.54,20.83 87.83,20.83 CFA.2 RFIA.1
N$35  (via drill 0.6)
  Top 0.305: U3.2 90.1,21.66 89.78,21.34 87.58,21.34 CFA.1 87.24,23.53 RFA.1 88.51,23.62 v88.76,23.88
  Bottom 0.305: v88.76,23.88 88.76,24.64 88.51,24.89 86.11,24.89 PHA.K
N$36
  Top 0.305: U3.7 90.1,19.63 91.05,20.57 92.48,20.57 CFB.2 RFIB.1
N$37  (via drill 0.6)
  Top 0.305: U3.6 89.45,19.38 89.27,19.56 v88.51,19.56 | v91.05,19.3 91.39,18.96 CFB.1 92.74,18.8 RFB.1
  Bottom 0.305: v91.05,19.3 90.79,19.56 v88.51,19.56 85.97,17.02 85.97,15.03 PHB.K
N$38
  Bottom 0.305: RHYSA1.2 RHYSA2.1 91.94,38.06 U5.1
N$39  (via drill 0.6)
  Top 0.305: v94.35,34.29 92.32,34.29 v92.06,34.04
  Bottom 0.305: RHYSB1.2 90.28,36.49 RHYSB2.1 90.37,34.04 v92.06,34.04 | U5.3 94.47,34.42 v94.35,34.29
N$40
  Bottom 0.305: PREF.1 85.53,30.75 RREF1.2
N$41
  Bottom 0.305: PREF.3 85.53,34.45 RREF2.2
PGC
  Bottom 0.254: UPIC.P$22 43.89,33.73 56.64,46.48 70.1,46.48 70.61,46.99 70.61,54.61 71.12,55.12 JICSP.5
PGC1
  Bottom 0.254: UPIC1.11 88.64,53.65 87.11,53.65 86.86,53.4 86.86,49.33 86.52,49 JICSP1.5
PGD  (via drill 0.6)
  Top 0.254: v59.18,48.01 59.18,51.82 59.94,52.58 JICSP.4
  Bottom 0.254: UPIC.P$21 43.24,34.1 57.17,48.03 59.16,48.03 v59.18,48.01
PGD1
  Bottom 0.254: JICSP1.4 85.03,50.27 84.7,50.6 84.7,55.3 85.08,55.68 87.8,55.68 UPIC1.12
R_RFBIAS
  Top 0.254: URF.17 21.85,59.08 R_RFBIAS.1
RF_!CSN!  (via drill 0.6)
  Top 0.254: URF.7 22.85,66.03 24.38,67.56 28.7,67.56 28.96,67.31 v28.96,31.24
  Bottom 0.254: UPIC.P$11 29.01,31.19 v28.96,31.24
RF_MISO  (via drill 0.6)
  Top 0.254: URF.2 27.68,62.75 27.94,62.48 v27.94,30.23
  Bottom 0.254: UPIC.P$10 29.52,30.54 29.21,30.23 v27.94,30.23
RF_MOSI  (via drill 0.6)
  Top 0.254: URF.20 23.35,60.98 23.62,60.71 25.65,60.71 25.91,60.45 v25.91,28.19
  Bottom 0.254: UPIC.P$8 30.26,29.24 29.21,28.19 v25.91,28.19
RF_N
  Top 0.254: URF.13 18.94,63.25 CRF1.1
RF_P
  Top 0.254: URF.12 18.95,63.75 CRF2.1
RF_SCLK  (via drill 0.6)
  Top 0.254: v26.92,29.21 26.92,61.98 26.65,62.25 URF.1
  Bottom 0.254: UPIC.P$9 29.89,29.89 29.21,29.21 v26.92,29.21
RTOP
  Bottom 0.254: RTOP.2 JDRUM.6
SHIELD
  Top 0.61: 26.16,73.91 18.03,73.91 17.53,73.41 17.53,69.34 | 26.16,73.91 26.16,68.33 24.64,68.33 | 26.16,73.91 26.16,79.25
SHIELD2
  Top 0.61: 1.02,40.13 24.89,40.13 24.89,58.17
SPARE1  (via drill 0.6)
  Top 0.254: v31.75,19.56 JSPARE.1
  Bottom 0.254: UPIC.P$44 36.89,23.94 36.58,23.62 36.58,19.81 36.32,19.56 v31.75,19.56
SPARE2  (via drill 0.6)
  Top 0.254: v33.53,20.57 8.38,20.57 6.86,22.1 JSPARE.2
  Bottom 0.254: UPIC.P$1 36.12,24.69 35.81,24.38 35.81,20.83 35.56,20.57 v33.53,20.57
SPARE3  (via drill 0.6)
  Top 0.254: v31.75,21.59 9.14,21.59 8.64,22.1 8.64,24.13 8.13,24.64 JSPARE.3
  Bottom 0.254: UPIC.P$2 35.25,25.34 35.05,25.15 35.05,21.84 34.8,21.59 v31.75,21.59
SPARE4  (via drill 0.6)
  Top 0.254: JSPARE.4 8.89,27.18 9.4,26.67 9.4,23.11 9.91,22.61 v29.97,22.61
  Bottom 0.254: UPIC.P$3 34.37,25.99 34.04,25.65 34.04,22.86 33.78,22.61 v29.97,22.61
SPARE5  (via drill 0.6)
  Top 0.254: v28.45,23.62 10.67,23.62 10.16,24.13 10.16,29.21 9.65,29.72 JSPARE.5
  Bottom 0.254: UPIC.P$4 33.75,26.64 33.53,26.42 33.53,23.88 33.27,23.62 v28.45,23.62
SPARE6  (via drill 0.6)
  Top 0.254: v26.67,24.64 11.43,24.64 10.92,25.15 10.92,31.75 10.41,32.26 JSPARE.6
  Bottom 0.254: UPIC.P$5 33.13,27.29 32.77,26.92 32.77,24.89 32.51,24.64 v26.67,24.64
SUB_A-B  (via drill 0.6)
  Top 0.305: U4.9 U4.10 v99.43,35.81
  Bottom 0.305: v99.43,35.81 U5.4
SUB_B-A  (via drill 0.6)
  Top 0.305: U4.12 U4.13 95.62,32.26 v95.36,32.51
  Bottom 0.305: U5.2 93.33,35.69 93.33,32.77 93.59,32.51 v95.36,32.51
TI_A
  Top 0.305: RFIA.2 85.71,23.53 RFA.2 85.62,25.22 CFIA.1 RLA.2 88.93,25.31 89.52,25.91 95.62,25.91 | 95.62,25.91 U4.2 | U4.5 99.43,25.15 98.67,25.91 95.62,25.91
TI_B
  Top 0.305: RFIB.2 94.09,18.03 94.44,17.69 RFB.2 RLB.2 | 94.35,18.71 RFIB.2 | 96.89,20.83 U4.3 | U4.6 100.7,21.08 100.44,20.83 96.89,20.83 | RFIB.2 94.18,19.05 CFIB.1 96.04,20.49 96.38,20.83 96.89,20.83
TRANSF_N
  Top 0.61: JTRAN.3 76.2,16.51 | 76.2,16.51 JTRAN.2 76.2,14.99 74.49,13.27 Q2.4 | Q2.6 72.67,16.29 72.9,16.51 76.2,16.51
TRANSF_P
  Top 0.61: JTRAN.4 77.47,20.32 77.72,20.07 77.72,12.95 77.47,12.7 JTRAN.1 | Q1.4 74.49,18.35 76.2,20.07 JTRAN.4 | Q1.6 72.67,21.87 72.9,22.1 75.95,22.1 76.2,21.84 JTRAN.4
UART_RX  (via drill 0.6)
  Top 0.254: D5.1 100.14,51.76 C7.1 | R3.2 99.82,52.24 C7.1 | v93.97,58.22 93.97,60.51 94.35,60.89 96.89,60.89 97.14,61.15 99.56,61.15 99.94,60.76 99.94,58.73 100.44,58.22 100.44,55.81 100.95,55.3 100.95,52.38 100.83,52.26 100.03,52.26 C7.1
  Bottom 0.254: UPIC1.4 92.98,56.22 93.78,57.02 | 93.78,57.02 93.93,57.17 93.93,58.65 v93.97,58.22 | D6.1 94.23,56.56 93.78,57.02
USB_RX  (via drill 0.6)
  Top 0.254: v49.78,11.68 55.12,11.68 55.47,11.33 UUSB.5
  Bottom 0.254: UPIC.P$37 41.94,20.04 48.51,13.72 48.51,12.95 v49.78,11.68
USB_TX  (via drill 0.6)
  Top 0.254: v51.31,12.7 57.66,12.7 58.07,12.29 UUSB.1
  Bottom 0.254: UPIC.P$36 42.59,20.91 v51.31,12.7
USBDM  (via drill 0.6)
  Top 0.254: UUSB.16 50.27,3.54 50.8,4.06 v50.8,4.57
  Bottom 0.254: JUSB.D- 50.33,5.04 v50.8,4.57
USBDP  (via drill 0.6)
  Top 0.254: UUSB.15 49.62,4.48 v49.53,4.57
  Bottom 0.254: JUSB.D+ v49.53,4.57
VCAP
  Bottom 0.254: UPIC.P$7 30.88,28.59 30.48,28.19 30.48,26.8 CCAP.1
VDC
  Top 0.254: D1.1 97.77,50.13 D5.2
  Top 0.305: C2.1 90.18,52.03 89.27,51.11 89.27,48.45 89.39,48.32 90.02,48.32 D2.1
  Top 0.61: D2.1 93.86,48.35 L1.1 94.1,48.32 D1.1
VDCOUPL
  Top 0.254: 24.64,66.29 CBYP_RFD3.2 24.3,66.1 URF.5
VIN
  Top 0.61: D4.1 93.84,50.21 93.97,50.33 L1.2 93.99,52.13 94.6,52.13 94.94,52.46 D3.1 94.94,56.46 UREG1.3 94.98,56.51 94.98,59.24 95.57,59.83 C3.A
VIN+  (via drill 0.6)
  Top 0.406: JIN.1 100.31,3.69 99.68,4.32 95.87,4.32 95.11,5.08 94.86,5.08 | 94.86,5.08 92.82,5.08 | 92.82,5.08 v92.06,5.08 | v88,4.06 87.49,4.06 86.47,5.08 CRIN+.A | U1.5 92.86,5.04 92.82,5.08 | U1.8 94.81,5.04 94.86,5.08
  Bottom 0.406: v92.06,5.08 89.01,5.08 v88,4.06
VIN-
  Top 0.406: U2.5 89.06,5.88 89.27,6.1 91.05,6.1 | 91.05,6.1 97.52,6.1 | 97.52,6.1 CRIN-.C | U2.8 91,6.05 91.05,6.1 | 97.52,6.1 97.52,7.23 97.9,7.62 99.43,7.62 99.94,8.13 99.94,10.92 100.32,11.31 JIN.4
VREF
  Bottom 0.305: RHYSA1.1 RHYSB1.1 89.01,36.74 89.01,33.27 88.76,33.02 PREF.2 87.49,32.58 CREF.1
X1_OSC1
  Bottom 0.254: UPIC.P$30 47.53,26.64 48.26,25.91 48.26,22.86 48.77,22.35 X1.P$1 49.85,22.03 50.29,21.59 50.29,20.66 CX1_1.1
X1_OSC2
  Bottom 0.254: UPIC.P$31 46.65,25.99 47.24,25.4 47.24,22.61 46.99,22.35 X1.P$2 45.38,22.08 CX1_2.1
X2_OSC1
  Top 0.254: URF.8 22.35,66.29 23.88,67.82 23.88,70.17 X2.P$1 | 23.62,70.29 X2.P$1 | CX2_1.1 24.22,70.89 X2.P$1
X2_OSC2
  Top 0.254: URF.10 21.35,65.52 20.57,66.29 20.57,68.83 19.56,69.85 19.56,70.29 X2.P$2 | 19.15,70.7 X2.P$2 | 19.47,70.38 X2.P$2 | CX2_2.1 19.22,70.63 X2.P$2

## Text on the board
tPlace: Laser Beacon V3 | [BTX] Board v1.0 | Paul M. - 11/2012
_tNames: RL2 | RL1 | LED_2 | LED_1 | LED1 | LED2 | LED3 | LED7 | LED6 | LED5 | LED4 | CX2_2 | CX2_1 | X2 | CBYP_RFA4 | JLAS1 | JLAS2 | JANT | CRF3 | CBYP_RFA2 | CRF6 | CBYP_RFD3 | LRF2 | CRF2 | C3 | CBYP_RFD1 | LRF3 | CRF4 | CRF1 | UREG | URF | R2 | R1 | CRF5 | CBYP_RFD2 | LRF1 | C5 | JLED2 | CBYP_RFA1 | CBYP_RFA3 | R_RFBIAS | RMCLR | C4 | C2 | R3 | C1 | D3 | C6 | RMCLR | D4 | L1 | JICSP | D1 | D5 | JLED1 | D2 | JICSP | JCOIL2 | JCOIL1 | CDRUM | CBYP_U5-1 | JOUT | CBYP_U5-2 | RLA | JDRUM | CFIA | JSPARE | U4 | RFA | U3 | Q1 | CFB | RFIB | RFIA | CFA | CFIB | RFB | RLB | JPOW | CBYP_CAN | CROUT- | RR2+ | RR2- | RR1+ | UREG | RS_CAN | Q2 | JTRAN | UUSB | RR1- | CRBYP- | CRBYP+ | CBYP_FTDI2 | CROUT+ | C1 | UCAN | RLTX | RLRX | RCAN | CRIN+ | U2 | U1 | JIN | LED_TX | LED_RX | CRNR- | CRNR+ | CRIN-
_bNames: QLED7 | QLED6 | QLED5 | RL7 | RL6 | RL5 | QLAS | UPIC | QLED4 | D6 | RL4 | RL3 | QLED1 | RL2 | RL1 | QLED2 | QLED3 | RTOP | RHYSA1 | RHYSA2 | RREF2 | RHYSB1 | RHYSB2 | CBYP_1 | PREF | U5 | RREF1 | CREF | CCAP | UPIC | CBYP_2 | CBYP_U4+ | UMOD | CBYP_U4- | X1 | PHA | CBYP_3 | CX1_2 | CX1_1 | CBYP_U3 | PHB | JUSB | CBYP_FTDI1 | JBAT | JCAN | JPCAN